# EAGLE board bandpass 40m (EAGLE 9.1.2)
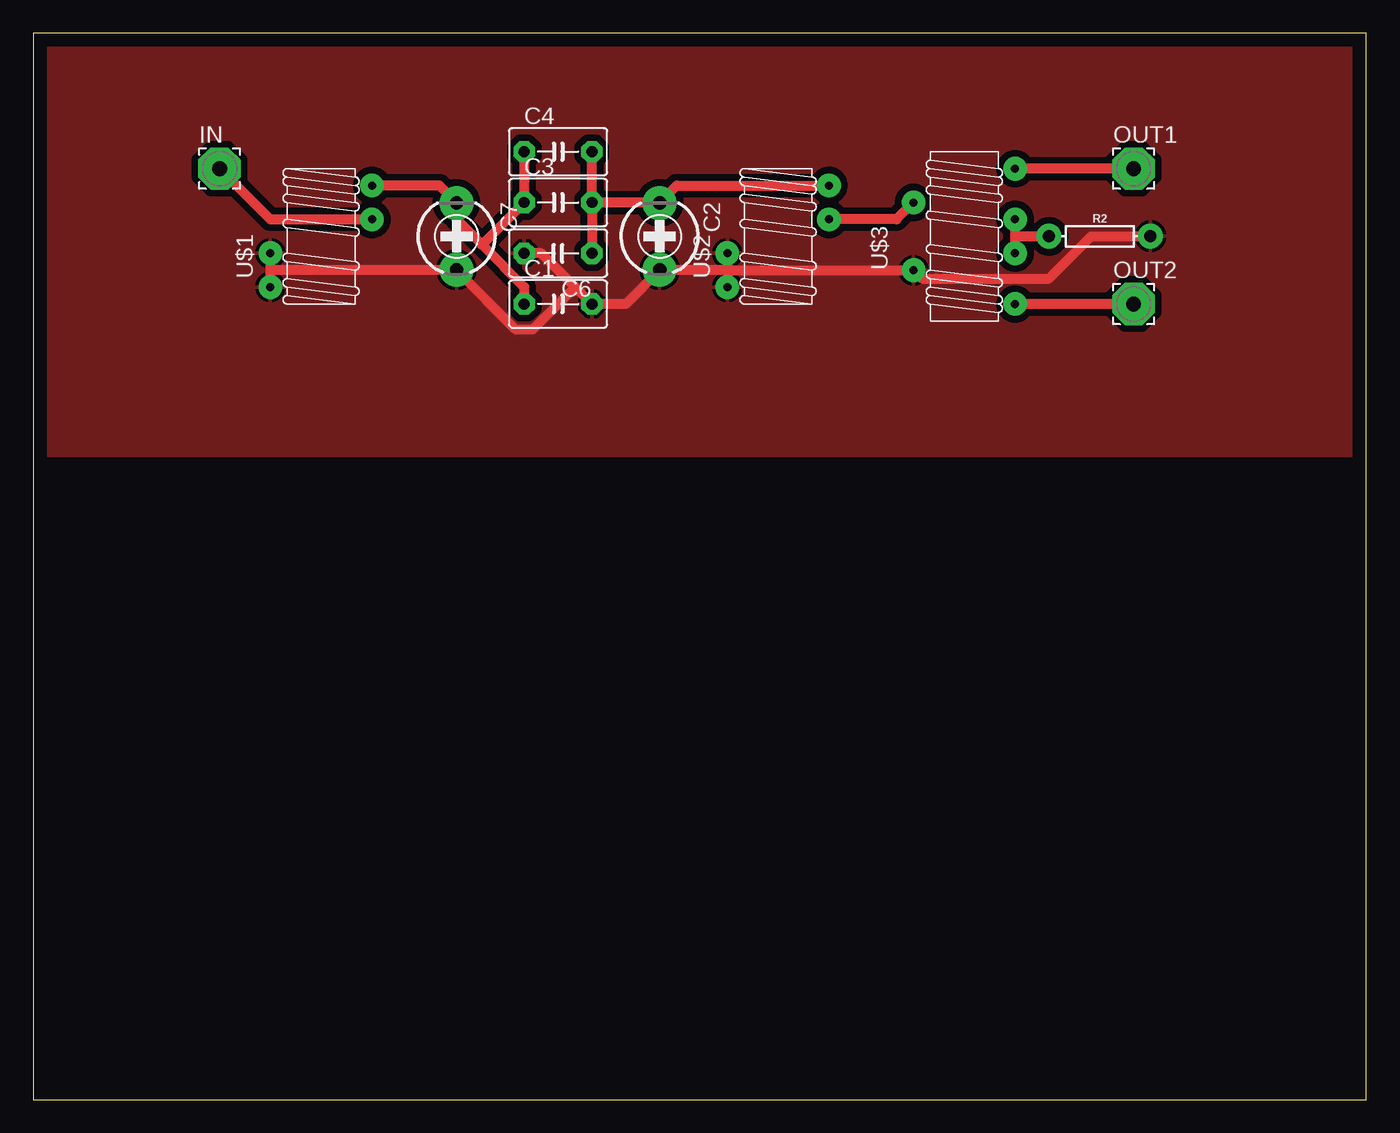
[diagram p0: board, top side]

Size 100 x 80 mm. Coordinates in mm from the lower left corner, seen from the top.
Outline: 0,0 100,0 100,80 0,80 0,0
Copper layers (1*16): Top 0.035mm / dielectric 1.5mm / Bottom 0.035mm
Design rules "default": minimum track width 6mil, minimum drill 0.35mm, track to track 6mil, track to pad 6mil, pad to pad 6mil, via to via 6mil, smd to smd 6mil, copper to edge 40mil, drill to drill 6mil, minimum pad ring 10mil, minimum via ring 8mil, stop-mask expansion 4mil, vias tented up to drill 0mil, thermal gap 10mil
Net classes: 0 default: width 0.762 mm, drill 0.762 mm, clearance 0.508 mm

## Footprints (pad centres in the part's own frame; a part is rotated, then mirrored left to right if it is on the bottom)
C5B3.5 = drill 0.813 pad 1.6 octagon: 1 -2.54,0; 2 2.54,0
CTRIMTZ03 = drill 1 pad 2.54: 1 0,2.5; 2 0,-2.5
3,17/1,1 = drill 1.118 pad 3.175 octagon: 1 0,0
AXIAL-0.3 = drill 0.9 pad 1.88: P$1 -3.81,0; P$2 3.81,0
T37_TRANSFORMER = drill 0.6 pad 1.778: C1A -3.81,-3.81; C1B 3.81,1.27; C2A -3.81,-1.27; C2B 3.81,3.81
T50_SPLITTER = drill 0.6 pad 1.778: C1A -1.27,-5.08; C1B -1.27,0; C2A 6.35,-3.81; C2B 6.35,-7.62; C3A 6.35,-1.27; C3B 6.35,2.54

## Placement (x,y rotation side)
C1  150pF  [C5B3.5]  39.37,59.69 0 top
C2  [CTRIMTZ03]  46.99,64.77 180 top
C3  10pF  [C5B3.5]  39.37,67.31 0 top
C4  5pF  [C5B3.5]  39.37,71.12 0 top
C6  150pF  [C5B3.5]  39.37,63.5 180 top
C7  [CTRIMTZ03]  31.75,64.77 180 top
IN  [3,17/1,1]  13.97,69.85 0 top
OUT1  [3,17/1,1]  82.55,69.85 0 top
OUT2  [3,17/1,1]  82.55,59.69 0 top
R2  27  [AXIAL-0.3]  80.01,64.77 0 top
U$1  T37_TRANSFORMER  [T37_TRANSFORMER]  21.59,64.77 0 top
U$2  T37_TRANSFORMER  [T37_TRANSFORMER]  55.88,64.77 0 top
U$3  T50_SPLITTER  [T50_SPLITTER]  67.31,67.31 0 top

## Library data of the parts
C1 C3 C4 C6 = capacitor-wima
C2 C7 = resistor
IN OUT1 OUT2 = wirepad
R2 = SparkFun-Resistors; PROD_ID: RES-12182
U$1-U$3 = toroid

## Nets
GND: C1.2 C2.1 C6.2 C7.1 R2.P$2 U$1.C1A U$1.C2A U$2.C1A U$2.C2A U$3.C1A
N$1: C1.1 C3.1 C4.1 C7.2 U$1.C2B
N$2: IN.1 U$1.C1B
N$3: C2.2 C3.2 C4.2 C6.1 U$2.C2B
N$4: U$2.C1B U$3.C1B
N$5: OUT1.1 U$3.C3B
N$6: R2.P$1 U$3.C2A U$3.C3A
N$7: OUT2.1 U$3.C2B

## Tracks (layer width: path | path; a pad name or v marks a point on that pad's centre or on a via)
GND
  Top 0.762: U$1.C2A 17.78,62.23 | 17.78,62.23 U$1.C1A | 31.75,62.23 17.78,62.23 | 46.99,62.23 44.45,59.69 C1.2 40.64,60.96 | C6.2 38.1,63.5 40.64,60.96 | U$2.C2A 52.07,62.23 | 52.07,62.23 U$2.C1A | 52.07,62.23 U$3.C1A 66.67,61.59 76.2,61.59 79.38,64.77 R2.P$2 | 52.07,62.23 46.99,62.23 | 46.99,62.23 C2.1 | 31.75,62.23 36.2,57.78 37.47,57.78 40.64,60.96 | 31.75,62.23 C7.1
  pour Top: 0,80.01 100.33,80.01 100.33,48.26 0,48.26
N$1
  Top 0.762: C4.1 C3.1 33.66,64.14 | C1.1 36.83,60.96 33.66,64.14 | 33.66,64.14 31.75,66.04 C7.2 31.75,67.31 30.48,68.58 U$1.C2B
N$2
  Top 0.762: U$1.C1B 17.78,66.04 IN.1
N$3
  Top 0.762: C3.2 C6.1 | C3.2 C4.2 | U$2.C2B 48.26,68.58 46.99,67.31 | 46.99,67.31 C3.2 | 46.99,67.31 C2.2
N$4
  Top 0.762: U$2.C1B 64.77,66.04 U$3.C1B
N$5
  Top 0.762: OUT1.1 U$3.C3B
N$6
  Top 0.762: U$3.C3A 73.66,64.77 | 73.66,64.77 U$3.C2A | 73.66,64.77 R2.P$1
N$7
  Top 0.762: OUT2.1 U$3.C2B